# Altium PCB PCB1_1.pcbdoc
Units mil, origin at the board's own origin, x right, y up, seen from the top; angles counter-clockwise.
Board outline 3612.99 x 2650 mil, 2 copper layers (Top Layer, Bottom Layer); 17 components, 9 nets, 48 pads, 0 vias.
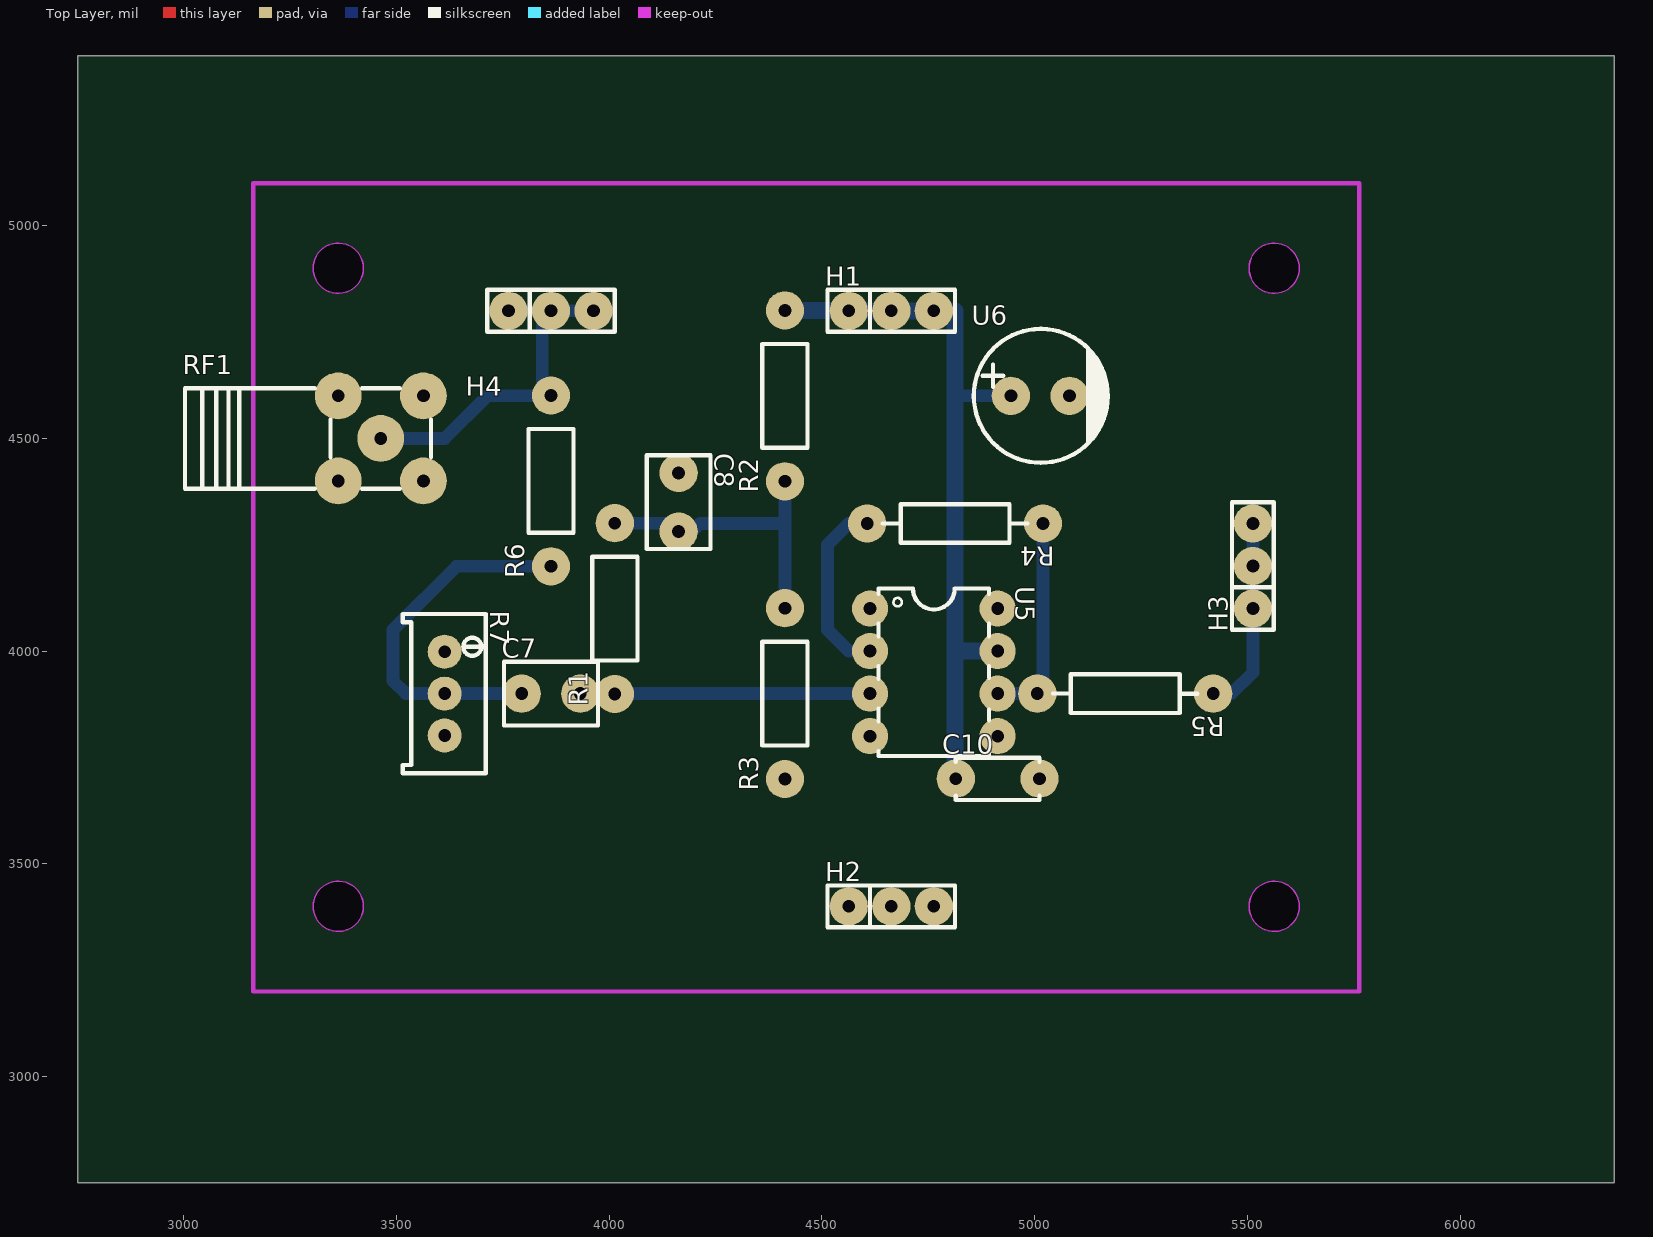
[diagram p0: Top Layer view]
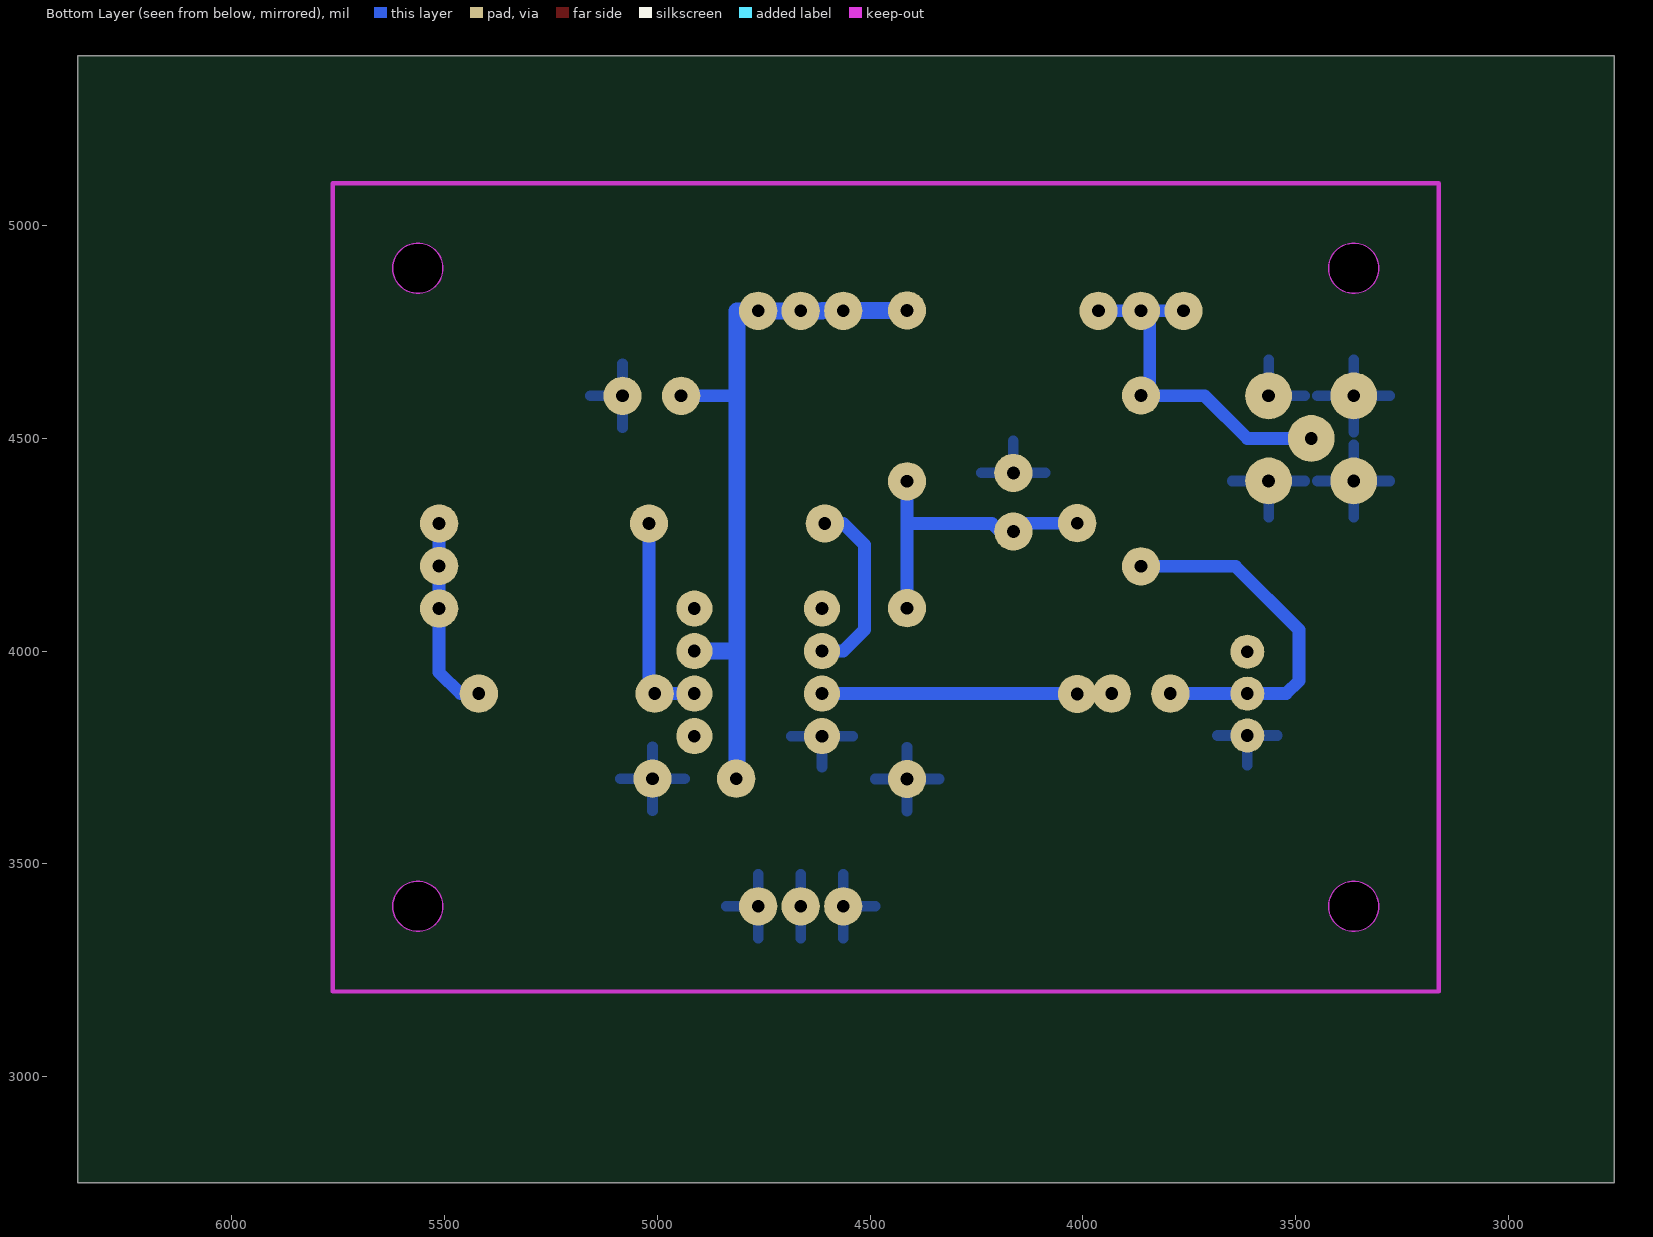
[diagram p1: Bottom Layer view, seen from below]

## Layer stack, top to bottom
Top Layer: signal copper (thickness not stored)
Dielectric: dielectric 12.6, FR-4, Dk 4.8
Bottom Layer: signal copper (thickness not stored)

## Board outline
6362.99,2750 2750,2750 2750,5400 6362.99,5400
cut-out: 3422.05,4900 cw(c3362.99,4900) 3303.94,4900 cw(c3362.99,4900)
cut-out: 5622.05,4900 cw(c5562.99,4900) 5503.94,4900 cw(c5562.99,4900)
cut-out: 5622.05,3400 cw(c5562.99,3400) 5503.94,3400 cw(c5562.99,3400)
cut-out: 3422.05,3400 cw(c3362.99,3400) 3303.94,3400 cw(c3362.99,3400)

## Design rules (kind name [scope] priority, off if disabled: settings)
BoardOutlineClearance copperThickness1oz [All] p0: genericclearance=10 ignorepadtopadclearanceinfootprint=FALSE except(0: Arc-SplitContinuation Track-SplitContinuation SMDPad-SplitContinuation THPad-SplitContinuation Via-SplitContinuation Fill-SplitContinuation Poly-SplitContinuation Region-SplitContinuation Text-SplitContinuation; 6: Track-CutoutEdge SMDPad-CutoutEdge THPad-CutoutEdge Via-CutoutEdge Region-CutoutEdge; 11.8: Track-OutlineEdge SMDPad-OutlineEdge THPad-OutlineEdge Via-OutlineEdge Fill-OutlineEdge Region-OutlineEdge Poly-OutlineEdge Text-OutlineEdge Fill-CutoutEdge)
BoardOutlineClearance copperThickness2oz [All] p0: genericclearance=10 ignorepadtopadclearanceinfootprint=FALSE except(0: Arc-SplitContinuation Track-SplitContinuation SMDPad-SplitContinuation THPad-SplitContinuation Via-SplitContinuation Fill-SplitContinuation Poly-SplitContinuation Region-SplitContinuation Text-SplitContinuation; 6: Track-CutoutEdge SMDPad-CutoutEdge THPad-CutoutEdge Via-CutoutEdge Region-CutoutEdge; 11.8: Track-OutlineEdge SMDPad-OutlineEdge THPad-OutlineEdge Via-OutlineEdge Fill-OutlineEdge Region-OutlineEdge Poly-OutlineEdge Text-OutlineEdge Fill-CutoutEdge)
Clearance copperThickness1oz [(InNet('$1N1087') OR InNet('GND') OR InNet('$1N1078') OR InNet('VCC') OR InNet('$1N1083') OR InNet('$1N1079') OR InNet('ADC') OR InNet('SIG') OR InNet('$1N1724'))] p1: gap=7 ignorepadtopadclearanceinfootprint=FALSE except(4: Track-Track; 6: Track-SMDPad SMDPad-SMDPad Track-THPad SMDPad-THPad THPad-THPad Track-Via SMDPad-Via THPad-Via Via-Via SMDPad-Fill THPad-Fill Via-Fill Fill-Fill Track-Region SMDPad-Region THPad-Region Via-Region Region-Region Track-Poly SMDPad-Poly THPad-Poly Via-Poly Fill-Poly Region-Poly Poly-Poly Track-Text SMDPad-Text THPad-Text Via-Text Fill-Text Region-Text Poly-Text Text-Text; 6.9: Track-Hole SMDPad-Hole THPad-Hole Via-Hole Fill-Hole Region-Hole Poly-Hole Text-Hole Sheet-Hole; 11.8: Track-Fill Fill-Region Track-Sheet SMDPad-Sheet THPad-Sheet Via-Sheet Fill-Sheet Region-Sheet Poly-Sheet Text-Sheet)
Clearance copperThickness2oz [All] p1: gap=7 ignorepadtopadclearanceinfootprint=FALSE except(6: Track-SMDPad SMDPad-SMDPad Track-THPad SMDPad-THPad THPad-THPad Track-Via SMDPad-Via THPad-Via Via-Via SMDPad-Fill THPad-Fill Via-Fill Fill-Fill Track-Region SMDPad-Region THPad-Region Via-Region Region-Region Track-Poly SMDPad-Poly THPad-Poly Via-Poly Fill-Poly Region-Poly Poly-Poly Track-Text SMDPad-Text THPad-Text Via-Text Fill-Text Region-Text Poly-Text Text-Text; 6.9: Track-Hole SMDPad-Hole THPad-Hole Via-Hole Fill-Hole Region-Hole Poly-Hole Text-Hole Sheet-Hole; 8: Track-Track; 11.8: Track-Fill Fill-Region Track-Sheet SMDPad-Sheet THPad-Sheet Via-Sheet Fill-Sheet Region-Sheet Poly-Sheet Text-Sheet)
DiffPairsRouting differentialPair [All] p1: maxuncoupledlength=10 minlimit=5.9843 maxlimit=5.9843 mostfreqgap=5.9843 toplayer_minwidth=5 toplayer_prefwidth=10 toplayer_maxwidth=100 bottomlayer_minwidth=5 bottomlayer_prefwidth=10 bottomlayer_maxwidth=100
PasteMaskExpansion pasteMaskExpansion [All] p1: expansion=0
PlaneConnect innerPlane [All] p1: planeconnectstyle=Relief reliefexpansion=20 reliefentries=4 reliefconductorwidth=10 reliefairgap=10
PolygonConnect copperRegion [All] p1: connectstyle=Relief reliefentries=4 reliefconductorwidth=25 polygonreliefangle="90 Angle" airgapwidth=30
RoutingVias viaSize [All] p1: viastyle="Through Hole" holewidth=12.0078 minholewidth=11.811 maxholewidth=248.0316 width=24.0158 minwidth=19.685 maxwidth=393.7008
SolderMaskExpansion solderMaskExpansion [All] p1: useseparateexpansions=TRUE expansion=2.0079 expansionbottom=2.0079
Width copperThickness1oz [All] p1: maxlimit=100 minlimit=5 preferedwidth=10
Width copperThickness2oz [All] p1: maxlimit=100 minlimit=8 preferedwidth=10

## Components (designator, comment, footprint, x,y, rotation, side; value= is the part's Value field where it differs from the comment)
C7 "CD1E106MC9BER2F100" CAP-TH_L5.5-W3.8-P3.50-D0.6 3862.99,3900 r0 top
C8 "CD1E106MC9BER2F100" CAP-TH_L5.5-W3.8-P3.50-D0.6 4162.99,4350 r270 top
C10 "CC1H104MC1FD3F6C10MF" CAP-TH_L5.0-W2.5-P5.00-D1.0 4912.99,3700 r0 top
H1 "PZ254V-11-03P" HDR-TH_3P-P2.54-V-M 4662.99,4800 r0 top
H2 "PZ254V-11-03P" HDR-TH_3P-P2.54-V-M 4662.99,3400 r0 top
H3 "PZ254V-11-03P" HDR-TH_3P-P2.54-V-M 5512.99,4200 r90 top
H4 "PZ254V-11-03P" HDR-TH_3P-P2.54-V-M 3862.99,4800 r0 top
R1 "MF1/4W-100K±1%-OT26" RES-TH_BD2.7-L6.2-P10.20-D0.4 4012.99,4100 r90 top
R2 "MF1/4W-100K±1%-OT26" RES-TH_BD2.7-L6.2-P10.20-D0.4 4412.99,4600 r90 top
R3 "MF1/4W-100K±1%-OT26" RES-TH_BD2.7-L6.2-P10.20-D0.4 4412.99,3900 r90 top
R4 "MF1/4W-20KΩ±1% T" RES-TH_BD2.3-L6.5-P10.50-D0.5 4812.99,4300 r180 top
R5 "MF1/4W-20KΩ±1% T" RES-TH_BD2.3-L6.5-P10.50-D0.5 5212.99,3900 r180 top
R6 "MF1/4W-100K±1%-OT26" RES-TH_BD2.7-L6.2-P10.20-D0.4 3862.99,4400 r90 top
R7 "3296W-1-103" RES-ADJ-TH_3P-L10.0-W10.0-P2.50-L 3612.99,3900 r270 top
RF1 "KH-SMA-K513-G" ANT-TH_KH-SMA-K513-G 3462.99,4500 r0 top
U5 "OPA27GP" PDIP-8_L9.6-W6.4-P2.54-LS7.6-BL 4762.99,3950 r270 top
U6 "87EC0068" CAP-TH_BD8.0-P3.50-D0.6-FD_1 5012.99,4600 r0 top

## Footprints (in the part's own frame and the unit in brackets; to place one, negate y for a bottom-side part, rotate by r counter-clockwise, add the part's x,y. Pads: shape width x height; smd on the part's side, far side on the other; paste and mask are expansions set on the pad)
ANT-TH_KH-SMA-K513-G [mil]
  round 110 hole 30: 1(-100,-100) 2(-100,100) 3(100,100) 4(100,-100) 5(0,0)
  silkscreen extent -461,-118 118,118
CAP-TH_BD8.0-P3.50-D0.6-FD_1 [mil]
  round 90 hole 30: 1(-68.9,0) 2(68.9,0)
  silkscreen extent -156,-157 159,157
CAP-TH_L5.0-W2.5-P5.00-D1.0 [mil]
  round 90 hole 30: 1(-98.43,0) 2(98.42,0)
  silkscreen extent -98,-50 98,49
CAP-TH_L5.5-W3.8-P3.50-D0.6 [mil]
  round 90 hole 30: 1(-68.9,0) 2(68.9,0)
  silkscreen extent -110,-75 110,75
HDR-TH_3P-P2.54-V-M [mil]
  round 90 hole 30: 1(-100,0) 2(0,0) 3(100,0)
  silkscreen extent -150,-49 150,49
PDIP-8_L9.6-W6.4-P2.54-LS7.6-BL [mil]
  round 85 hole 30: 1(-150,-150) 2(-50,-150) 3(50,-150) 4(150,-150) 5(150,150) 6(50,150) 7(-50,150) 8(-150,150)
  silkscreen extent -197,-130 197,130
RES-ADJ-TH_3P-L10.0-W10.0-P2.50-L [mil]
  round 80 hole 30: 1(-98.43,0) 2(0,0) 3(98.43,0)
  silkscreen extent -187,-98 187,96
RES-TH_BD2.3-L6.5-P10.50-D0.5 [mil]
  round 90 hole 30: 1(-206.69,0) 2(206.69,0)
  silkscreen extent -170,-45 170,45
RES-TH_BD2.7-L6.2-P10.20-D0.4 [mil]
  round 90 hole 30 copper offset -0.01,0: 1(-200.78,0)
  round 90 hole 30 copper offset 0.01,0: 2(200.78,0)
  silkscreen extent -122,-53 122,53

## Nets (pads, with @x,y where several pads share a name; then routed paths per layer and width w, separated by ;. In a path a pad name is that pad's centre, name@x,y a point inside that pad or via, vN(x,y) a via of type N, cw(c..) or ccw(c..) an arc to the next point about the centre after c; other vN are vias at no path point)
$1N1078: C8.2 R1.2 R2.1 R3.2 | length 718.1
  Bottom Layer w30: R1.2 4143.3,4300.79 C8.2 4194.09,4281.1 4212.99,4300 4404.04,4300 4412.99,4308.95 ; R3.2 4412.99,4308.95 ; R2.1 4412.99,4308.95
$1N1079: R4.2 U5.2 | length 434.7
  Bottom Layer w30: R4.2 4562.99,4300 4512.99,4250 4512.99,4050 4562.99,4000 U5.2
$1N1083: R4.1 R5.2 U5.6 | length 498.9
  Bottom Layer w30: U5.6 R5.2 5019.68,3913.38 R4.1
$1N1087: C7.2 R1.1 U5.3 | length 581.1
  Bottom Layer w30: R1.1@4031.89,3900 U5.3
$1N1724: C7.1 R6.1 R7.2 | length 867.8
  Bottom Layer w30: C7.1 R7.2 3521.78,3900 3491.78,3930 3491.78,4050 3640.99,4199.21 R6.1
ADC: H3.1 H3.2 H3.3 R5.1 | length 464
  Bottom Layer w30: R5.1 5462.99,3900 5512.99,3950 H3.1 H3.2 H3.3
GND: C8.1 C10.2 H2.1 H2.2 H2.3 R3.1 R7.3 RF1.1 RF1.2 RF1.3 RF1.4 U5.4 U6.2
SIG: H4.1 H4.2 H4.3 R6.2 RF1.5 | length 849.4
  Bottom Layer w30: RF1.5 3612.99,4500 3712.99,4600 3862.2,4600 R6.2 3842.6,4621.19 H4.2@3842.6,4800 ; H4.1 H4.2@3842.6,4800 ; H4.3 H4.2 H4.2@3842.6,4800
VCC: C10.1 H1.1 H1.2 H1.3 R2.2 U5.7 U6.1 | length 1732.1
  Bottom Layer w30: 4812.99,4600 U6.1
  Bottom Layer w40: R2.2 4612.2,4800.79 4612.99,4800 H1.2 H1.3 4812.99,4800 4812.99,4600 4812.99,4000 ; C10.1 4812.99,3701.57 4812.99,4000 ; U5.7 4812.99,4000
pads on no net: R7.1 U5.1 U5.5 U5.8

## Polygon pours and split planes (outlines as drawn)
GND on Bottom Layer (solid, remove dead copper, pour order 0): 3112.99,5150 6112.99,5150 6112.99,3000 3112.99,3000

## Keep-outs
Board Outline Layer:
  circle w1: c3362.99,4900 r59.06
  region: 3422.05,4900 cw(c3362.99,4900) 3303.94,4900 cw(c3362.99,4900)
  circle w1: c5562.99,4900 r59.06
  region: 5622.05,4900 cw(c5562.99,4900) 5503.94,4900 cw(c5562.99,4900)
  circle w1: c5562.99,3400 r59.06
  region: 5622.05,3400 cw(c5562.99,3400) 5503.94,3400 cw(c5562.99,3400)
  circle w1: c3362.99,3400 r59.06
  region: 3422.05,3400 cw(c3362.99,3400) 3303.94,3400 cw(c3362.99,3400)
  lines w10: 3162.99,3200 5762.99,3200 5762.99,5100 3162.99,5100 3162.99,3200

## Silkscreen, mask and mechanical layers (free items; w line width, h text height)
Mechanical Layer:
  circle w1: c3362.99,4900 r59.06
  circle w1: c5562.99,4900 r59.06
  circle w1: c5562.99,3400 r59.06
  circle w1: c3362.99,3400 r59.06